# EAGLE board My-Stomp_1_1 (EAGLE 6.5.0)
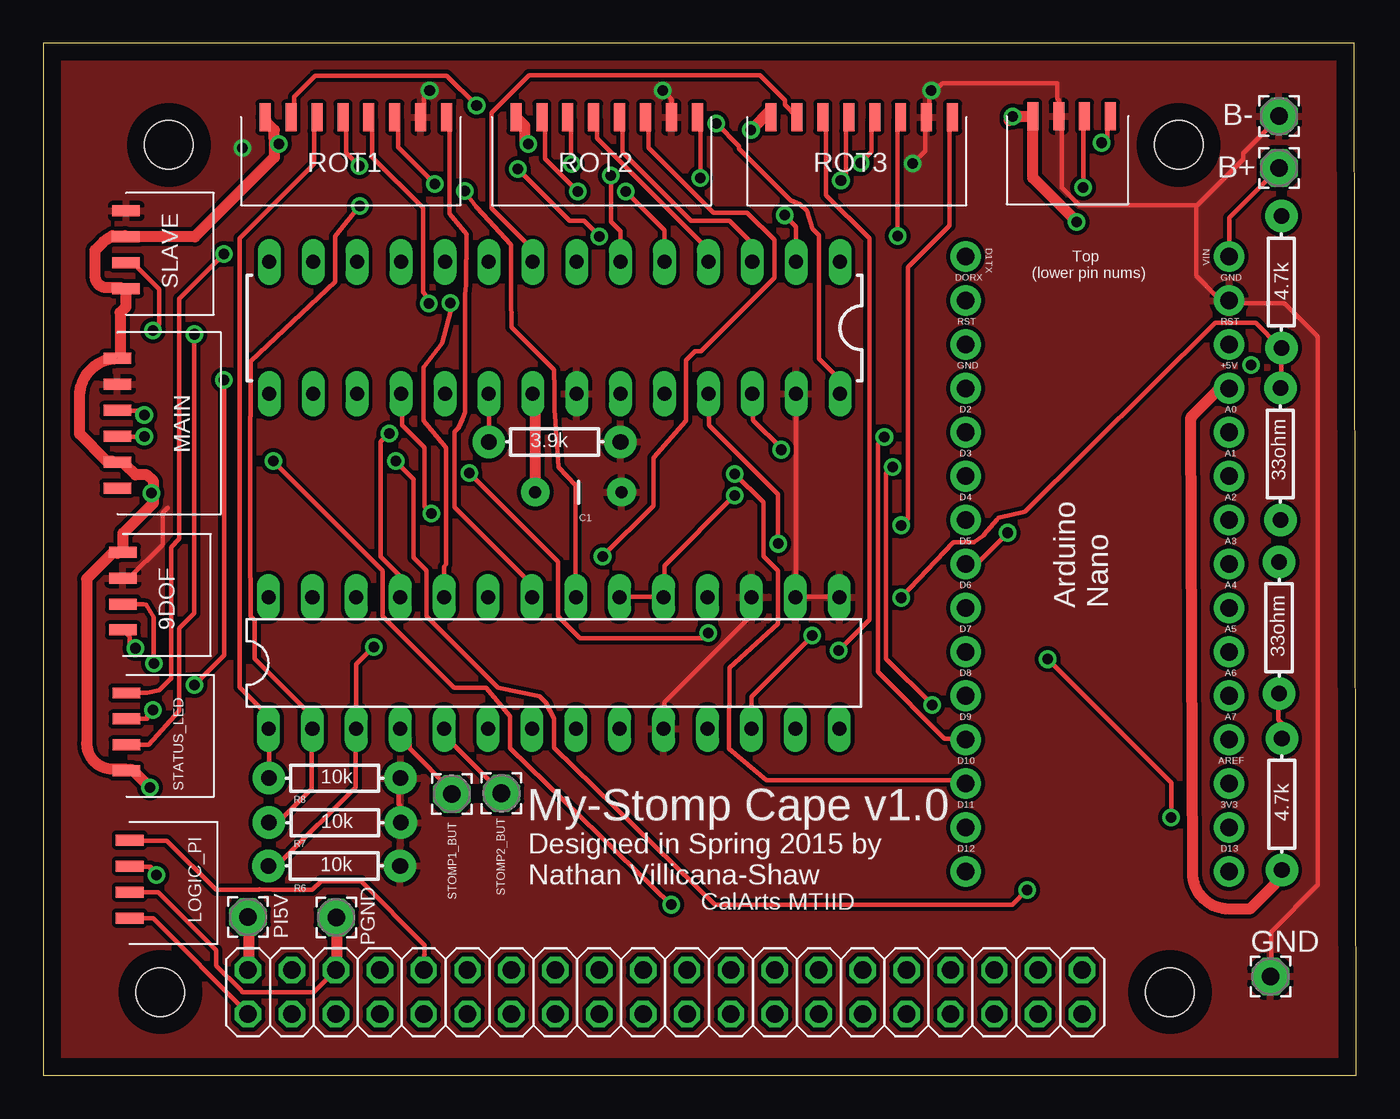
[diagram p0: board, top side]
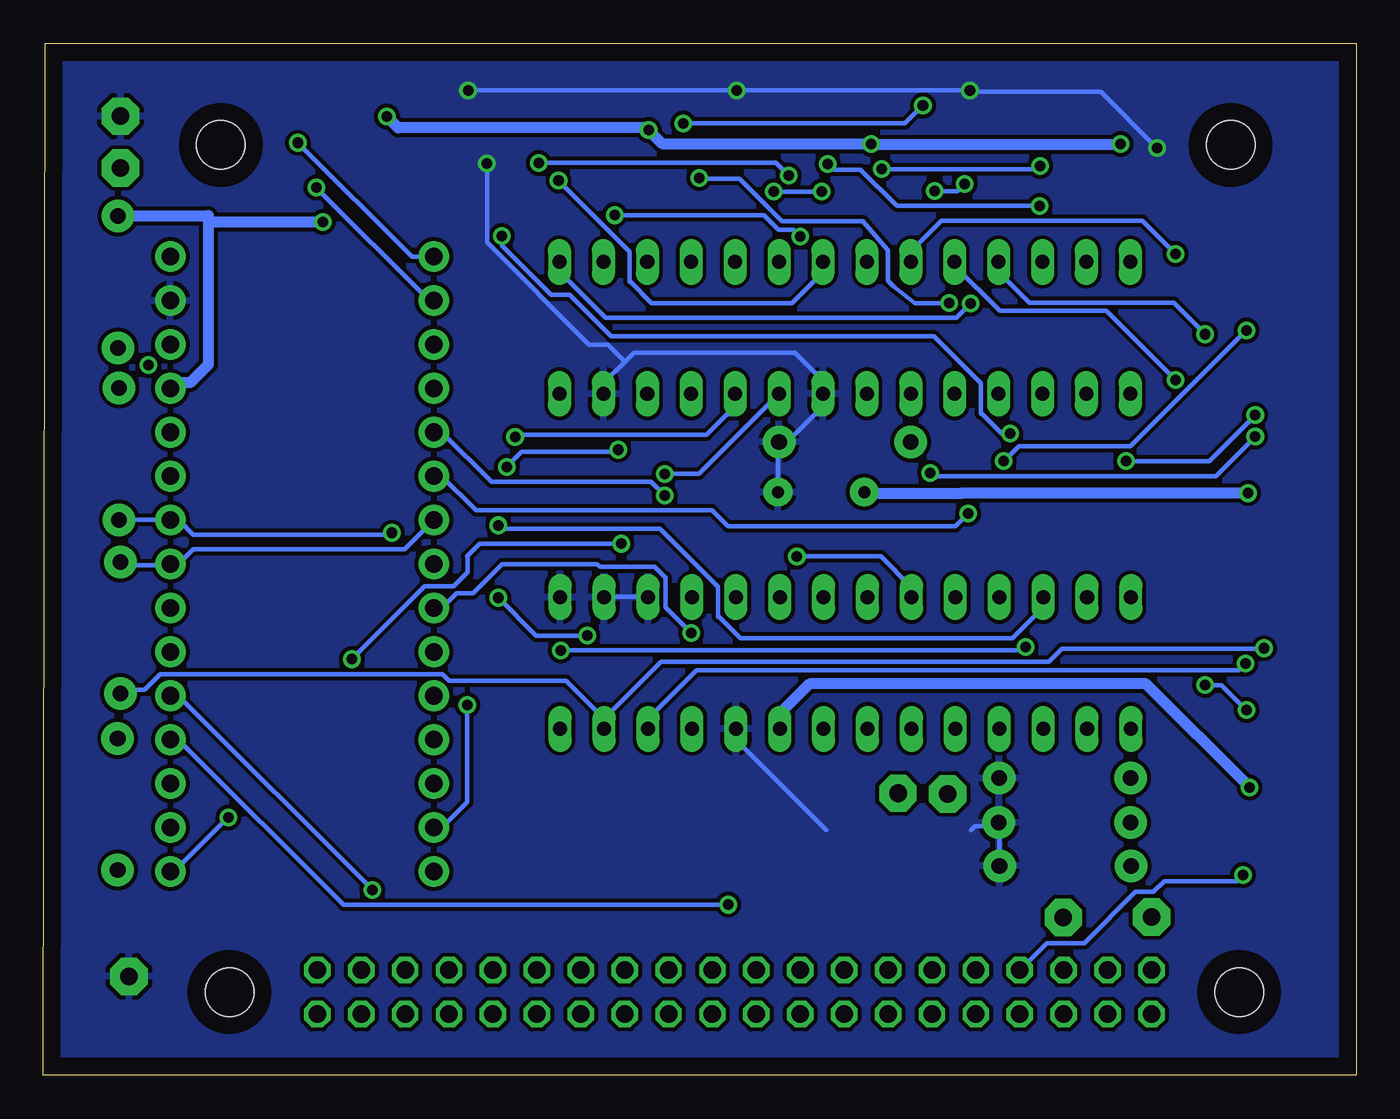
[diagram p1: board, bottom side, seen from below]

Size 75.97 x 59.69 mm. Coordinates in mm from the lower left corner, seen from the top.
Outline: 0,0 75.97,0 75.84,59.69 0,59.69 0,0
Copper layers (1*16): Top 0.035mm / dielectric 1.5mm / Bottom 0.035mm
Design rules "default": minimum track width 10mil, minimum drill 24mil, track to track 8mil, track to pad 8mil, pad to pad 8mil, via to via 8mil, smd to smd 8mil, copper to edge 40mil, drill to drill 8mil, minimum pad ring 10mil, minimum via ring 8mil, stop-mask expansion 4mil, vias tented up to drill 0mil, thermal gap 10mil
Net classes: 0 default: width 0.254 mm, drill 0.33 mm, clearance 0.229 mm; 1 VCC: width 0.635 mm, drill 0.381 mm, clearance 0.33 mm

## Footprints (pad centres in the part's own frame; a part is rotated, then mirrored left to right if it is on the bottom)
PICO_SPOX_4C = smd 1.6 x 0.635: P$1 0,-3; P$2 0,-1.5; P$3 0,0; P$4 0,1.5
2,15/1,0 = drill 1.016 pad 2.159 octagon: 1 0,0
CAP-PTH-5MM = drill 0.7 pad 1.651: 1 -2.5,0; 2 2.5,0
DIL28-3 = drill 0.813 long: 1 -16.51,-3.81; 2 -13.97,-3.81; 3 -11.43,-3.81; 4 -8.89,-3.81; 5 -6.35,-3.81; 6 -3.81,-3.81; 7 -1.27,-3.81; 8 1.27,-3.81; 9 3.81,-3.81; 10 6.35,-3.81; 11 8.89,-3.81; 12 11.43,-3.81; 13 13.97,-3.81; 14 16.51,-3.81; 15 16.51,3.81; 16 13.97,3.81; 17 11.43,3.81; 18 8.89,3.81; 19 6.35,3.81; 20 3.81,3.81; 21 1.27,3.81; 22 -1.27,3.81; 23 -3.81,3.81; 24 -6.35,3.81; 25 -8.89,3.81; 26 -11.43,3.81; 27 -13.97,3.81; 28 -16.51,3.81
PICO_SPOX_6C = smd 1.6 x 0.635: P$1 0,-4.5; P$2 0,-3; P$3 0,-1.5; P$4 0,0; P$5 0,1.5; P$6 0,3
ARDUINO_NANO = drill 1.016 pad 1.778: 3V3 6.35,1.27; 5V 31.75,1.27; A0 11.43,1.27; A1 13.97,1.27; A2 16.51,1.27; A3 19.05,1.27; A4 21.59,1.27; A5 24.13,1.27; A6 26.67,1.27; A7 29.21,1.27; D2 29.21,16.51; D3 26.67,16.51; D4 24.13,16.51; D5 21.59,16.51; D6 19.05,16.51; D7 16.51,16.51; D8 13.97,16.51; D9 11.43,16.51; D10 8.89,16.51; D11 6.35,16.51; D12 3.81,16.51; D13 3.81,1.27; GND 31.75,16.51; GND. 36.83,1.27; REF 8.89,1.27; RST 34.29,16.51; RST. 34.29,1.27; RX1 36.83,16.51; TX1 39.37,16.51; VIN 39.37,1.27
AXIAL-0.3 = drill 0.9 pad 1.88: P$1 -3.81,0; P$2 3.81,0
2X20 = drill 1.016 octagon: 1 -24.13,-1.27; 2 -24.13,1.27; 3 -21.59,-1.27; 4 -21.59,1.27; 5 -19.05,-1.27; 6 -19.05,1.27; 7 -16.51,-1.27; 8 -16.51,1.27; 9 -13.97,-1.27; 10 -13.97,1.27; 11 -11.43,-1.27; 12 -11.43,1.27; 13 -8.89,-1.27; 14 -8.89,1.27; 15 -6.35,-1.27; 16 -6.35,1.27; 17 -3.81,-1.27; 18 -3.81,1.27; 19 -1.27,-1.27; 20 -1.27,1.27; 21 1.27,-1.27; 22 1.27,1.27; 23 3.81,-1.27; 24 3.81,1.27; 25 6.35,-1.27; 26 6.35,1.27; 27 8.89,-1.27; 28 8.89,1.27; 29 11.43,-1.27; 30 11.43,1.27; 31 13.97,-1.27; 32 13.97,1.27; 33 16.51,-1.27; 34 16.51,1.27; 35 19.05,-1.27; 36 19.05,1.27; 37 21.59,-1.27; 38 21.59,1.27; 39 24.13,-1.27; 40 24.13,1.27 | hole 2.794: -29.21,0; 29.21,0; -28.71,49; 29.71,49
PICO_SPOC_8C = smd 1.6 x 0.635: P$1 0,3; P$2 0,1.5; P$3 0,0; P$4 0,-1.5; P$5 0,-3; P$6 0,-4.5; P$7 0,-6; P$8 0,-7.5

## Placement (x,y rotation side)
9DOF  PICO_SPOX_4C  [PICO_SPOX_4C]  4.61,28.75 0 top
B+  [2,15/1,0]  71.5,52.47 90 top
B-  [2,15/1,0]  71.5,55.47 180 top
C1  0.1uf  [CAP-PTH-5MM]  30.96,33.73 180 top
GND  [2,15/1,0]  71,5.72 0 top
IC1  MCP23017SP  [DIL28-3]  29.55,23.84 0 top
LOGIC_A  PICO_SPOX_4C  [PICO_SPOX_4C]  60.25,55.47 270 top
LOGIC_PI  PICO_SPOX_4C  [PICO_SPOX_4C]  5,12.09 0 top
MAIN  PICO_SPOX_6C  [PICO_SPOX_6C]  4.29,38.46 0 top
PCB2  ARDUINO_NANO  [ARDUINO_NANO]  69.89,7.98 90 top
PGND  [2,15/1,0]  16.95,9.13 0 top
PI5V  [2,15/1,0]  11.85,9.16 0 top
R1  3.9k  [AXIAL-0.3]  29.59,36.63 180 top
R2  4.7k  [AXIAL-0.3]  71.66,15.68 270 top
R3  33ohm  [AXIAL-0.3]  71.5,25.88 90 top
R4  4.7k  [AXIAL-0.3]  71.64,45.88 90 top
R5  33ohm  [AXIAL-0.3]  71.58,35.93 270 top
R6  10k  [AXIAL-0.3]  16.84,12.11 180 top
R7  10k  [AXIAL-0.3]  16.88,14.61 180 top
R8  10k  [AXIAL-0.3]  16.86,17.18 180 top
RASPBERRY_PI  [2X20]  35.98,4.81 0 top
ROT1  PICO_SPOX_8C  [PICO_SPOC_8C]  20.34,55.41 270 top
ROT2  PICO_SPOX_8C  [PICO_SPOC_8C]  34.85,55.41 270 top
ROT3  PICO_SPOX_8C  [PICO_SPOC_8C]  49.61,55.41 270 top
SLAVE  PICO_SPOX_4C  [PICO_SPOX_4C]  4.79,48.5 0 top
STATUS_LED  PICO_SPOX_4C  [PICO_SPOX_4C]  4.81,20.61 0 top
STOMP1_BUT  [2,15/1,0]  23.64,16.28 90 top
STOMP2_BUT  [2,15/1,0]  26.52,16.31 90 top
U1  TLC5940-NT  [DIL28-3]  29.59,43.23 180 top

## Library data of the parts
9DOF LOGIC_A LOGIC_PI MAIN ROT1-ROT3 SLAVE STATUS_LED = Mollex_Pico_Spox
B+ B- GND PGND PI5V STOMP1_BUT STOMP2_BUT = wirepad
C1 = SparkFun-Passives
IC1 = adafruit
PCB2 = E14_Arduino_published
R1-R8 = SparkFun
RASPBERRY_PI = raspberry_pi
U1 = SparkFun-DigitalIC

## Nets
3.3V_PI: LOGIC_PI.P$1 RASPBERRY_PI.1
ANALOG_1: MAIN.P$4 PCB2.A0
ANALOG_2: PCB2.A1 SLAVE.P$2
BLANK: PCB2.D10 U1.23
DCPRG: U1.19
GND: 9DOF.P$3 B-.1 C1.1 GND.1 IC1.10 IC1.15 IC1.16 IC1.17 LOGIC_A.P$2 MAIN.P$5 PCB2.GND. R1.P$1 R6.P$1 R7.P$1 R8.P$1 ROT1.P$2 ROT2.P$2 ROT3.P$2 SLAVE.P$4 U1.22 U1.27
GND_PI: LOGIC_PI.P$2 PGND.1 RASPBERRY_PI.6
GSCLK: PCB2.D3 U1.18
INTA: IC1.19 IC1.20 PCB2.D2
N$2: IC1.4 STOMP1_BUT.1
N$3: IC1.5 STOMP2_BUT.1
N$5: PI5V.1 RASPBERRY_PI.2
N$20: R1.P$2 U1.20
ROT1_B: ROT1.P$5 U1.2
ROT1_BUT: IC1.1 R8.P$2 ROT1.P$6
ROT1_G: ROT1.P$4 U1.1
ROT1_GCA: IC1.21 ROT1.P$3
ROT1_GCB: IC1.22 ROT1.P$1
ROT1_R: ROT1.P$7 U1.28
ROT2_B: ROT2.P$7 U1.5
ROT2_BUT: IC1.2 R7.P$2 ROT2.P$6
ROT2_G: ROT2.P$5 U1.4
ROT2_GCA: IC1.23 ROT2.P$3
ROT2_GCB: IC1.24 ROT2.P$1
ROT2_R: ROT2.P$4 U1.3
ROT3_B: ROT3.P$7 U1.8
ROT3_BUT: IC1.3 R6.P$2 ROT3.P$6
ROT3_G: ROT3.P$5 U1.7
ROT3_GCA: IC1.25 ROT3.P$3
ROT3_GCB: IC1.26 ROT3.P$1
ROT3_R: ROT3.P$4 U1.6
RX_PI: LOGIC_PI.P$4 RASPBERRY_PI.10
RXA: LOGIC_A.P$3 PCB2.RX1
SB: STATUS_LED.P$2 U1.11
SCL: 9DOF.P$2 IC1.12 R4.P$1 R5.P$1
SCLB: PCB2.A5 PCB2.D5 R5.P$2
SCLK: PCB2.D13 U1.25
SDA: 9DOF.P$1 IC1.13 R2.P$1 R3.P$1
SDAB: PCB2.A4 PCB2.D4 R3.P$2
SG: STATUS_LED.P$3 U1.10
SIN: PCB2.D11 U1.26
SR: STATUS_LED.P$4 U1.9
TX_PI: LOGIC_PI.P$3 RASPBERRY_PI.8
TXA: LOGIC_A.P$4 PCB2.TX1
US_RX: MAIN.P$3 PCB2.D6
VCC [VCC]: 9DOF.P$4 C1.2 IC1.9 LOGIC_A.P$1 MAIN.P$2 MAIN.P$6 PCB2.5V R2.P$2 R4.P$2 ROT1.P$8 ROT2.P$8 ROT3.P$8 SLAVE.P$1 SLAVE.P$3 STATUS_LED.P$1 U1.21
VIN: B+.1 PCB2.VIN
XLAT: PCB2.D9 U1.24

## Tracks (layer width: path | path; a pad name or v marks a point on that pad's centre or on a via)
3.3V_PI
  Top 0.254: LOGIC_PI.P$1 5.01,9.08 6.35,9.08 11.84,3.59 11.84,3.54 RASPBERRY_PI.1
ANALOG_1  (via drill 0.61)
  Top 0.254: v5.84,38.19 5.62,38.41 5.62,38.44 4.29,38.44 MAIN.P$4 | v13.31,35.52 19.64,29.19 19.64,26.55 23.78,22.41 25.63,22.41 27.02,20.77 27.02,18.92 v36.32,9.86
  Bottom 0.254: v5.84,38.19 8.51,35.52 v13.31,35.52 | v36.32,9.86 58.6,9.86 68.12,19.39 68.61,19.39 PCB2.A0
ANALOG_2  (via drill 0.61)
  Top 0.254: v6.35,43.09 6.71,43.44 6.71,45.45 5.46,46.7 5.46,46.97 4.8,46.97 SLAVE.P$2 | v20.4,35.52 21.44,34.48 21.44,29.93 22.18,29.19 22.18,26.55 26.32,22.41 28.73,21.92 29.06,21.58 29.31,21.09 29.56,20.62 29.56,18.95 38.86,9.86 56.06,9.86 v56.92,10.73
  Bottom 0.254: v6.35,43.09 13.06,36.38 19.54,36.38 v20.4,35.52 | v56.92,10.73 68.12,21.93 68.61,21.93 PCB2.A1
BLANK  (via drill 0.61)
  Top 0.254: v40.01,34.78 41.66,33.13 41.66,30.03 42.5,29.19 42.5,26.12 39.72,23.58 39.68,18.89 41.84,17.05 53.37,17.05 53.37,16.88 PCB2.D10
  Bottom 0.254: v40.01,34.78 38.03,34.78 33.4,39.41 U1.23
GND  (via drill 0.61)
  Top 0.254: IC1.15 43.54,27.67 IC1.16 43.56,27.77 43.56,39.41 U1.27 | R8.P$1 20.65,17.18 20.55,17.08 20.55,15.68 20.68,15.55 R7.P$1 | IC1.10 35.92,20.05 35.94,20.07 35.94,21.57 40.97,26.6 40.97,27.64 IC1.17 | 5.26,29.04 5.26,28.91 | 5.26,28.91 5.26,28.76 | 7.22,32.83 6.91,32.52 6.91,30.69 4.98,28.76 4.62,28.76 9DOF.P$3 5.26,28.91 | 5.11,49.97 4.8,49.97 SLAVE.P$4 | v22.35,56.96 22.02,56.63 22.02,55.61 21.85,55.43 ROT1.P$2 | v35.84,56.96 36.35,56.45 36.35,55.43 ROT2.P$2 | 51.5,56.84 52.02,57.36 58.68,57.36 58.68,56.47 58.75,56.4 58.75,55.48 LOGIC_A.P$2 58.8,55.36 58.93,55.23 58.93,51.34 59.95,50.33 66.6,50.33 66.7,50.25 | 51.5,56.84 51.28,56.63 51.28,55.58 51.13,55.43 ROT3.P$2 51.03,55.33 51.03,53.48 v50.29,52.74 | 66.7,50.25 66.7,46.24 67.87,45.07 67.87,44.81 68.61,44.81 PCB2.GND. 68.68,44.71 68.68,44.64 71.81,44.64 73.74,42.71 73.74,11.01 71.05,8.31 71.05,5.75 71.02,5.72 GND.1 | 66.7,50.25 69.42,52.97 69.42,53.32 71.48,55.38 71.48,55.46 B-.1 | v51.39,56.96 51.5,56.84 | v11.53,53.63 11.53,53.43
  Bottom 0.254: C1.1 33.45,33.74 33.45,36.51 33.43,36.51 R1.P$1 33.38,36.64 32.92,36.64 31.32,38.24 30.86,38.24 30.86,39.41 U1.22 30.91,39.53 30.91,40.6 31.3,40.6 32.49,41.79 41.78,41.79 42.31,41.27 | 42.31,41.27 43.54,40.04 43.54,39.43 U1.27 | R6.P$1 20.65,12.12 20.65,14.59 20.68,14.59 R7.P$1 20.75,14.41 22.07,14.41 22.3,14.18 | 30.66,14.18 35.89,19.41 IC1.10 | IC1.16 41,27.67 IC1.17 | v51.39,56.96 v35.84,56.96 v22.35,56.96 22.25,56.88 14.79,56.88 v11.53,53.63 | 42.31,41.27 43.28,42.25 44.38,42.25 50.29,48.17 v50.29,52.74
  pour Top: 0.25,59.7 76.05,59.7 76.05,0 0.25,0
  pour Bottom: 0,59.95 76.05,59.7 75.8,0.25 0,0
GND1  (via drill 0.61)
  other vias: 69.88,41.08
GND_PI
  Top 0.254: 17,6.13 16.94,6.08 RASPBERRY_PI.6 | 17,9.1 16.97,9.13 PGND.1 | LOGIC_PI.P$2 5.01,10.58 6.64,10.58 10,7.22 10,6.34 11.38,4.96 11.39,4.96 11.55,4.81 15.66,4.81 RASPBERRY_PI.6 | 16.69,6 RASPBERRY_PI.6
  Top 0.635: 17,6.13 17,9.09 PGND.1
GSCLK  (via drill 0.61)
  Top 0.254: v22.46,32.5 22.07,32.88 22.07,36.28 20.75,37.6 20.75,39.35 20.7,39.41 U1.18
  Bottom 0.254: v22.46,32.5 23.19,31.76 36.35,31.76 37.26,32.67 50.93,32.67 52.88,34.63 53.37,34.63 PCB2.D3
INTA  (via drill 0.61)
  Top 0.254: IC1.20 33.38,27.67 IC1.19 35.92,27.8 35.94,27.82 35.94,29.47 v40.01,33.54
  Bottom 0.254: v40.01,33.54 40.8,34.32 50.04,34.32 52.88,37.17 53.37,37.17 PCB2.D2
N$2
  Top 0.254: IC1.4 20.68,20.02 21.19,19.52 21.19,18.91 23.62,16.47 23.62,16.29 STOMP1_BUT.1
N$3
  Top 0.254: IC1.5 23.22,20.02 23.73,19.52 23.73,19.14 26.49,16.37 26.49,16.32 STOMP2_BUT.1
N$5
  Top 0.254: 11.91,6.13 11.86,6.08 RASPBERRY_PI.2 | 11.91,7.55 11.86,7.6 11.86,9.15 PI5V.1
  Top 0.635: 11.91,6.13 11.91,9.09 PI5V.1
N$20
  Top 0.254: U1.20 25.78,39.41 R1.P$2
ROT1_B  (via drill 0.61)
  Top 0.254: v18.29,52.59 17.53,53.35 17.53,55.23 ROT1.P$5 | v27.46,52.41 30.46,49.41 31.3,49.41 v32.18,48.52 | v42.9,49.74 43.56,49.08 U1.2
  Bottom 0.254: v18.29,52.59 18.47,52.41 v27.46,52.41 | v32.18,48.52 32.56,48.9 33.43,48.9 34.27,49.74 v42.9,49.74
ROT1_BUT
  Top 0.254: ROT1.P$6 15.83,55.41 15.67,55.25 15.67,52.71 11.36,48.4 11.36,22.44 13.03,20.76 13.03,20.05 IC1.1 13.06,19.92 13.06,17.2 R8.P$2
ROT1_G  (via drill 0.61)
  Top 0.254: v22.3,44.64 22.3,44.92 21.98,45.28 21.98,50.18 19.03,53.09 19.03,55.23 ROT1.P$4
  Bottom 0.254: v22.3,44.64 23.14,43.8 43.44,43.8 46.08,46.44 46.08,47.02 U1.1
ROT1_GCA  (via drill 0.61)
  Top 0.254: v22.66,51.55 20.53,53.68 20.53,55.23 ROT1.P$3 | v24.39,51.14 25.05,50.22 25.45,49.79 27.07,48.05 27.07,45.1 27.1,43.25 29.56,40.81 29.57,39.61 29.6,38.43 29.63,38.18 29.83,35.17 30.81,34.12 IC1.21
  Bottom 0.254: v22.66,51.55 23.07,51.14 v24.39,51.14
ROT1_GCB
  Top 0.254: ROT1.P$1 23.52,55.23 23.52,49.82 24.49,48.64 24.47,45.71 24.41,45.14 24.41,41.11 24.42,40.95 24.42,38.34 24.27,37.96 24.03,37.45 23.8,37.22 23.8,32.85 28.27,28.38 IC1.22
ROT1_R  (via drill 0.61)
  Top 0.254: v38.94,55.05 40.26,53.73 40.26,53.58 43.23,50.61 43.79,50.38 44.17,50 44.5,48.97 44.88,48.59 44.88,41.45 46.1,40.22 | 46.1,40.22 U1.28 | 46.1,40.22 46.1,40.6 | ROT1.P$7 14.35,55.43 14.51,55.58 14.51,56.6 15.73,57.82 23.34,57.82 v25.07,56.09
  Bottom 0.254: v25.07,56.09 26.11,55.05 v38.94,55.05
ROT2_B  (via drill 0.61)
  Top 0.254: v30.94,51.11 29.03,53.02 29.03,55.23 ROT2.P$7 | v33.71,51.11 35.94,48.88 U1.5
  Bottom 0.254: v33.71,51.11 v30.94,51.11
ROT2_BUT  (via drill 0.61)
  Top 0.254: v30.58,52.71 30.53,52.77 30.53,55.23 ROT2.P$6 | v18.32,50.28 16.89,48.54 16.89,45.89 11.99,41.31 11.99,38.16 11.98,38.03 11.98,28.84 12.02,28.69 12.02,26.55 12.25,26.32 12.25,24.09 15.57,20.76 15.57,20.05 IC1.2 15.52,19.92 15.52,16.57 13.87,14.92 13.87,14.61 13.08,14.61 R7.P$2
  Bottom 0.254: v30.58,52.71 30.25,52.38 28.68,52.38 26.57,50.28 v18.32,50.28
ROT2_G
  Top 0.254: ROT2.P$5 32.03,55.23 32.03,54.19 38.46,47.76 38.46,47.05 U1.4
ROT2_GCA  (via drill 0.61)
  Top 0.254: v32.36,30.01 35.31,32.95 35.31,35.72 37.18,37.85 37.18,41.36 37.7,41.88 38.06,41.88 42.3,46.12 42.3,48.32 40.73,49.89 38.79,49.89 35.03,53.65 35.03,55.23 ROT2.P$3
  Bottom 0.254: v32.36,30.01 27.51,30.01 25.76,28.25 25.76,27.67 IC1.23
ROT2_GCB  (via drill 0.61)
  Top 0.254: v38.03,51.9 38.03,55.25 37.87,55.41 ROT2.P$1 | v23.55,44.66 23.57,44.18 23.07,42.33 21.99,40.94 21.99,37.84 23.32,36.28 23.32,29.55 23.19,29.42 IC1.24
  Bottom 0.254: v38.03,51.9 37.98,51.85 35.69,51.85 33.23,49.39 28.55,49.39 27.09,47.71 27.09,45.96 26.76,45.62 25.53,44.66 v23.55,44.66
ROT2_R
  Top 0.254: ROT2.P$4 33.53,55.23 33.53,53.38 37.49,49.41 39.7,49.41 41,48.12 41,47.05 U1.3
ROT3_B
  Top 0.254: ROT3.P$7 43.59,55.43 42.9,56.12 42.9,56.4 41.45,57.84 28.11,57.84 25.94,55.67 25.94,50.15 28.3,47.79 28.3,47.05 U1.8
ROT3_BUT  (via drill 0.61)
  Top 0.254: v46.03,24.57 47.8,26.35 47.8,48.4 45.29,50.91 45.29,55.23 ROT3.P$6 | v19.13,24.77 18.11,23.76 18.11,20.05 IC1.3 18.06,19.92 18.06,16.67 13.82,12.43 13.82,12.12 13.03,12.12 R6.P$2
  Bottom 0.254: v46.03,24.57 19.33,24.57 v19.13,24.77
ROT3_G  (via drill 0.61)
  Top 0.254: v46.15,51.75 46.43,52.03 46.43,55.25 46.59,55.41 ROT3.P$5
  Bottom 0.254: v46.15,51.75 42.04,47.63 42.04,45.88 41.99,45.88 40.77,44.66 32.64,44.66 30.86,46.44 30.86,47.02 U1.7
ROT3_GCA  (via drill 0.61)
  Top 0.254: v49.43,48.55 49.43,55.23 ROT3.P$3 | v20.02,37.12 19.54,36.64 19.54,29.98 20.65,28.86 IC1.25
  Bottom 0.254: v49.43,48.55 49.43,47.99 46.59,45.14 45.52,45.14 43.11,42.73 24.44,42.73 21.72,40.01 21.72,38.26 21.67,38.26 20.5,37.09 20.04,37.09 v20.02,37.12
ROT3_GCB  (via drill 0.61)
  Top 0.254: v49.63,31.81 50.02,32.19 50.02,46.72 52.43,49.13 52.43,55.23 ROT3.P$1
  Bottom 0.254: v49.63,31.81 49.43,31.61 40.29,31.61 36.93,28.25 36.93,26.53 36.88,26.53 35.64,25.28 19.89,25.28 18.14,27.03 18.14,27.64 IC1.26
ROT3_R  (via drill 0.61)
  Top 0.254: v47.3,52.77 47.93,53.4 47.93,55.23 ROT3.P$4 | v32.84,52.03 32.84,49.36 33.4,48.8 U1.6
  Bottom 0.254: v47.3,52.77 33.58,52.77 v32.84,52.03
RX_PI
  Top 0.254: LOGIC_PI.P$4 5.01,13.57 7.15,13.57 10,10.72 12.5,10.72 12.53,10.75 13.27,10.74 15.18,10.74 15.55,10.74 16.08,11.21 18.39,11.21 22.07,7.53 22.07,6.99 22.02,6.94 22.02,6.08 RASPBERRY_PI.10
RXA  (via drill 0.61)
  Top 0.254: v60.17,51.34 60.17,55.41 60.23,55.46 LOGIC_A.P$3
  Bottom 0.254: v60.17,51.34 53.65,44.81 53.39,44.81 PCB2.RX1
SB  (via drill 0.61)
  Top 0.254: v8.74,42.86 8.74,26.73 7.88,25.87 7.88,21.09 6.11,19.11 6.02,19.11 4.83,19.11 STATUS_LED.P$2
  Bottom 0.254: v8.74,42.86 10.57,44.69 18.93,44.69 20.68,46.44 20.68,47.02 U1.11
SCL  (via drill 0.61)
  Top 0.254: R5.P$1 71.58,39.76 71.63,39.81 R4.P$1 71.53,42.15 70.16,43.52 67.95,43.52 67.82,43.53 56.8,32.59 55.27,32.24 55.19,32.13 54.44,31.25 54.42,31.24 53.85,30.82 52.71,30.82 52.66,30.83 v49.63,27.62 | v6.4,23.81 6.4,26.5 5.96,27.21 5.82,27.24 4.62,27.24 9DOF.P$2 | v44.5,25.44 40.97,21.9 40.97,20.05 IC1.12
  Bottom 0.254: v6.4,23.81 6.78,23.43 38.18,23.43 40.97,20.63 40.97,20.05 IC1.12 | v49.63,27.62 47.45,25.44 v44.5,25.44
SCLB  (via drill 0.61)
  Top 0.254: v55.81,31.38 54.13,29.7 54.13,29.57 53.39,29.57 PCB2.D5
  Bottom 0.254: v55.81,31.38 55.91,31.28 67.29,31.28 68.1,32.09 68.61,32.09 PCB2.A5 68.73,32.14 71.55,32.14 R5.P$2
SCLK  (via drill 0.61)
  Top 0.254: v42.52,30.74 42.52,33.61 38.53,37.6 38.53,39.35 38.48,39.41 U1.25 | v58.12,24.06 65.25,16.93 v65.25,14.92
  Bottom 0.254: v42.52,30.74 50.73,30.74 51.44,30.03 51.42,30.02 51.42,29.09 52.24,28.28 53.9,28.28 v58.12,24.06 | v65.25,14.92 68.38,11.79 68.61,11.79 PCB2.D13
SDA  (via drill 0.61)
  Top 0.254: R3.P$1 71.5,22.06 71.45,22.01 71.45,20.56 71.66,20.35 R2.P$1 | v5.34,24.7 5.01,25.03 5.01,25.36 4.62,25.74 9DOF.P$1
  Bottom 0.254: v5.34,24.7 5.36,24.67 17.02,24.67 17.78,23.91 40.24,23.91 43.51,20.63 43.51,20.05 IC1.13 43.61,20.71 45.72,22.82 52.48,22.82 52.86,23.2 69.19,23.2 70.11,22.28 71.3,22.28 71.5,22.08 R3.P$1
SDAB
  Bottom 0.254: PCB2.D4 53.39,32.09 55.07,30.41 67.29,30.41 68.12,29.57 68.61,29.57 PCB2.A4 68.71,29.5 71.33,29.5 71.5,29.68 R3.P$2
SG  (via drill 0.61)
  Top 0.254: v6.35,21.12 6.02,20.79 6.02,20.63 4.83,20.63 STATUS_LED.P$3 | v8.74,22.56 10.47,24.29 v10.47,40.22
  Bottom 0.254: v6.35,21.12 7.8,22.56 v8.74,22.56 | v10.47,40.22 14.45,44.2 20.63,44.2 23.22,46.8 23.22,47.02 U1.10
SIN  (via drill 0.61)
  Top 0.254: v42.7,36.18 42.7,36.25 41.07,37.88 41.07,39.35 41.02,39.41 U1.26 | v49.15,35.19 48.77,34.81 48.77,24.09 v51.44,21.42
  Bottom 0.254: v42.7,36.18 42.83,36.05 48.29,36.05 v49.15,35.19 | PCB2.D11 53.37,14.33 52.88,14.33 51.44,15.78 v51.44,21.42
SR  (via drill 0.61)
  Top 0.254: v10.47,47.51 7.88,44.92 7.88,31.02 7.39,30.54 7.39,22.95 7.38,22.92 6.72,22.26 6.02,22.13 4.83,22.13 STATUS_LED.P$4
  Bottom 0.254: v10.47,47.51 12.37,49.41 24,49.41 25.76,47.66 25.76,47.05 U1.9
TX_PI  (via drill 0.61)
  Top 0.254: v6.56,11.59 6.22,11.92 6.22,12.07 5.01,12.07 LOGIC_PI.P$3
  Bottom 0.254: v6.56,11.59 6.91,11.24 11.1,11.24 11.74,10.6 12.77,10.6 15.73,7.64 17.91,7.64 RASPBERRY_PI.8
TXA  (via drill 0.61)
  Top 0.254: v61.24,53.93 61.57,54.26 61.57,55.28 61.75,55.46 LOGIC_A.P$4
  Bottom 0.254: v61.24,53.93 54.64,47.33 53.39,47.33 PCB2.TX1
US_RX  (via drill 0.61)
  Top 0.254: v5.84,36.94 4.29,36.94 MAIN.P$3 | v24.67,34.83 29.8,29.7 29.8,26.55 31.07,25.28 38.48,25.28 v38.48,25.59
  Bottom 0.254: v5.84,36.94 8.13,34.66 24.49,34.66 v24.67,34.83 | v38.48,25.59 39.96,27.06 39.96,28.81 40.01,28.81 40.59,29.4 43.77,29.4 43.92,29.55 49.43,29.55 51.11,27.87 52.05,27.87 52.88,27.03 53.37,27.03 PCB2.D6
VCC  (via drill 0.61)  (1 unrouted)
  Top 0.635: MAIN.P$6 4.45,41.62 4.45,44.1 4.78,44.43 4.78,45.48 SLAVE.P$1 4.47,45.55 3.67,45.55 arc-90 3,46.22 3,47.72 3.5,48.22 3.68,48.36 4.01,48.56 4.73,48.56 SLAVE.P$3 | 4.78,48.47 SLAVE.P$3 | U1.21 28.32,39.41 28.48,39.25 28.48,38.01 28.47,37.12 28.47,34.81 28.48,34.15 28.48,33.74 C1.2 | 6.38,33.66 6.38,33.11 4.62,31.35 4.62,30.26 9DOF.P$4 4.29,30.21 4.29,30.19 3.99,30.19 2.52,28.71 2.52,19.2 arc90 4,17.72 4.7,17.72 arc-90 STATUS_LED.P$1 | STATUS_LED.P$1 | v6.18,16.65 5.13,17.69 STATUS_LED.P$1 | v6.25,33.66 6.38,33.66 | 3.99,41.44 MAIN.P$6 arc90 2.11,39.28 2.11,37.09 3.69,35.52 3.99,35.52 MAIN.P$2 4.29,35.44 4.75,35.44 4.75,35.31 5.35,34.72 6,34.72 6.38,34.34 6.38,33.66 | v28.07,53.86 27.87,54.06 27.87,54.9 ROT2.P$8 | v40.95,54.67 42.09,55.81 42.12,55.81 42.12,55.43 ROT3.P$8 | R2.P$2 71.66,11.85 71.28,11.46 71.28,11.08 69.8,9.61 68.61,9.61 arc-90 66.5,11.72 66.39,37.98 arc90 66.42,38.08 68.05,39.71 68.61,39.71 PCB2.5V | 55.88,55.23 v56.09,55.46 57.23,55.46 LOGIC_A.P$1 57.25,51.91 v59.79,49.36 | 13.36,54.14 13.36,54.67 12.93,55.1 ROT1.P$8 | v13.64,53.86 13.36,54.14 | 13.36,54.14 13.36,53.08 8.78,48.5 SLAVE.P$3
  Bottom 0.635: v6.18,16.65 12.17,22.64 31.62,22.64 33.25,21.02 33.35,21.02 33.35,20.05 IC1.9 | v6.25,33.66 22.81,33.66 22.84,33.64 28.37,33.64 28.45,33.71 C1.2 | v56.09,55.46 55.42,54.8 41.25,54.8 v40.95,54.67 40.16,53.88 28.09,53.88 v28.07,53.86 v13.64,53.86 | 66.42,49.36 66.42,49.72 71.63,49.72 R4.P$2 | 66.42,49.36 66.42,41.11 67.47,40.06 68.28,40.06 68.61,39.73 PCB2.5V | 66.42,49.36 v59.79,49.36
VIN
  Top 0.254: PCB2.VIN 68.61,49.58 B+.1
XLAT  (via drill 0.61)
  Top 0.254: v48.67,36.92 48.29,36.53 48.29,23.33 52.15,19.47 53.37,19.47 53.37,19.41 PCB2.D9
  Bottom 0.254: v48.67,36.92 48.54,37.04 37.59,37.04 36.4,38.24 35.94,38.24 35.94,39.41 U1.24

## Text on the board
_tsilk: My-Stomp Cape v1.0 | Designed in Spring 2015 by / Nathan Villicana-Shaw | CalArts MTIID